# Altium PCB IMX6WBED.PcbDoc (part 7 of 10)
Units mil, origin at the board's own origin, x right, y up, seen from the top; angles counter-clockwise.
Board outline 3318.23 x 4815.16 mil, 6 copper layers (Top Layer, L2_GND_1, L3_INT_1, L6_INT_2, L7_PWR_2, Bottom Layer), stack 27.7 mil thick; 504 components, 400 nets, 2357 pads, 1199 vias.
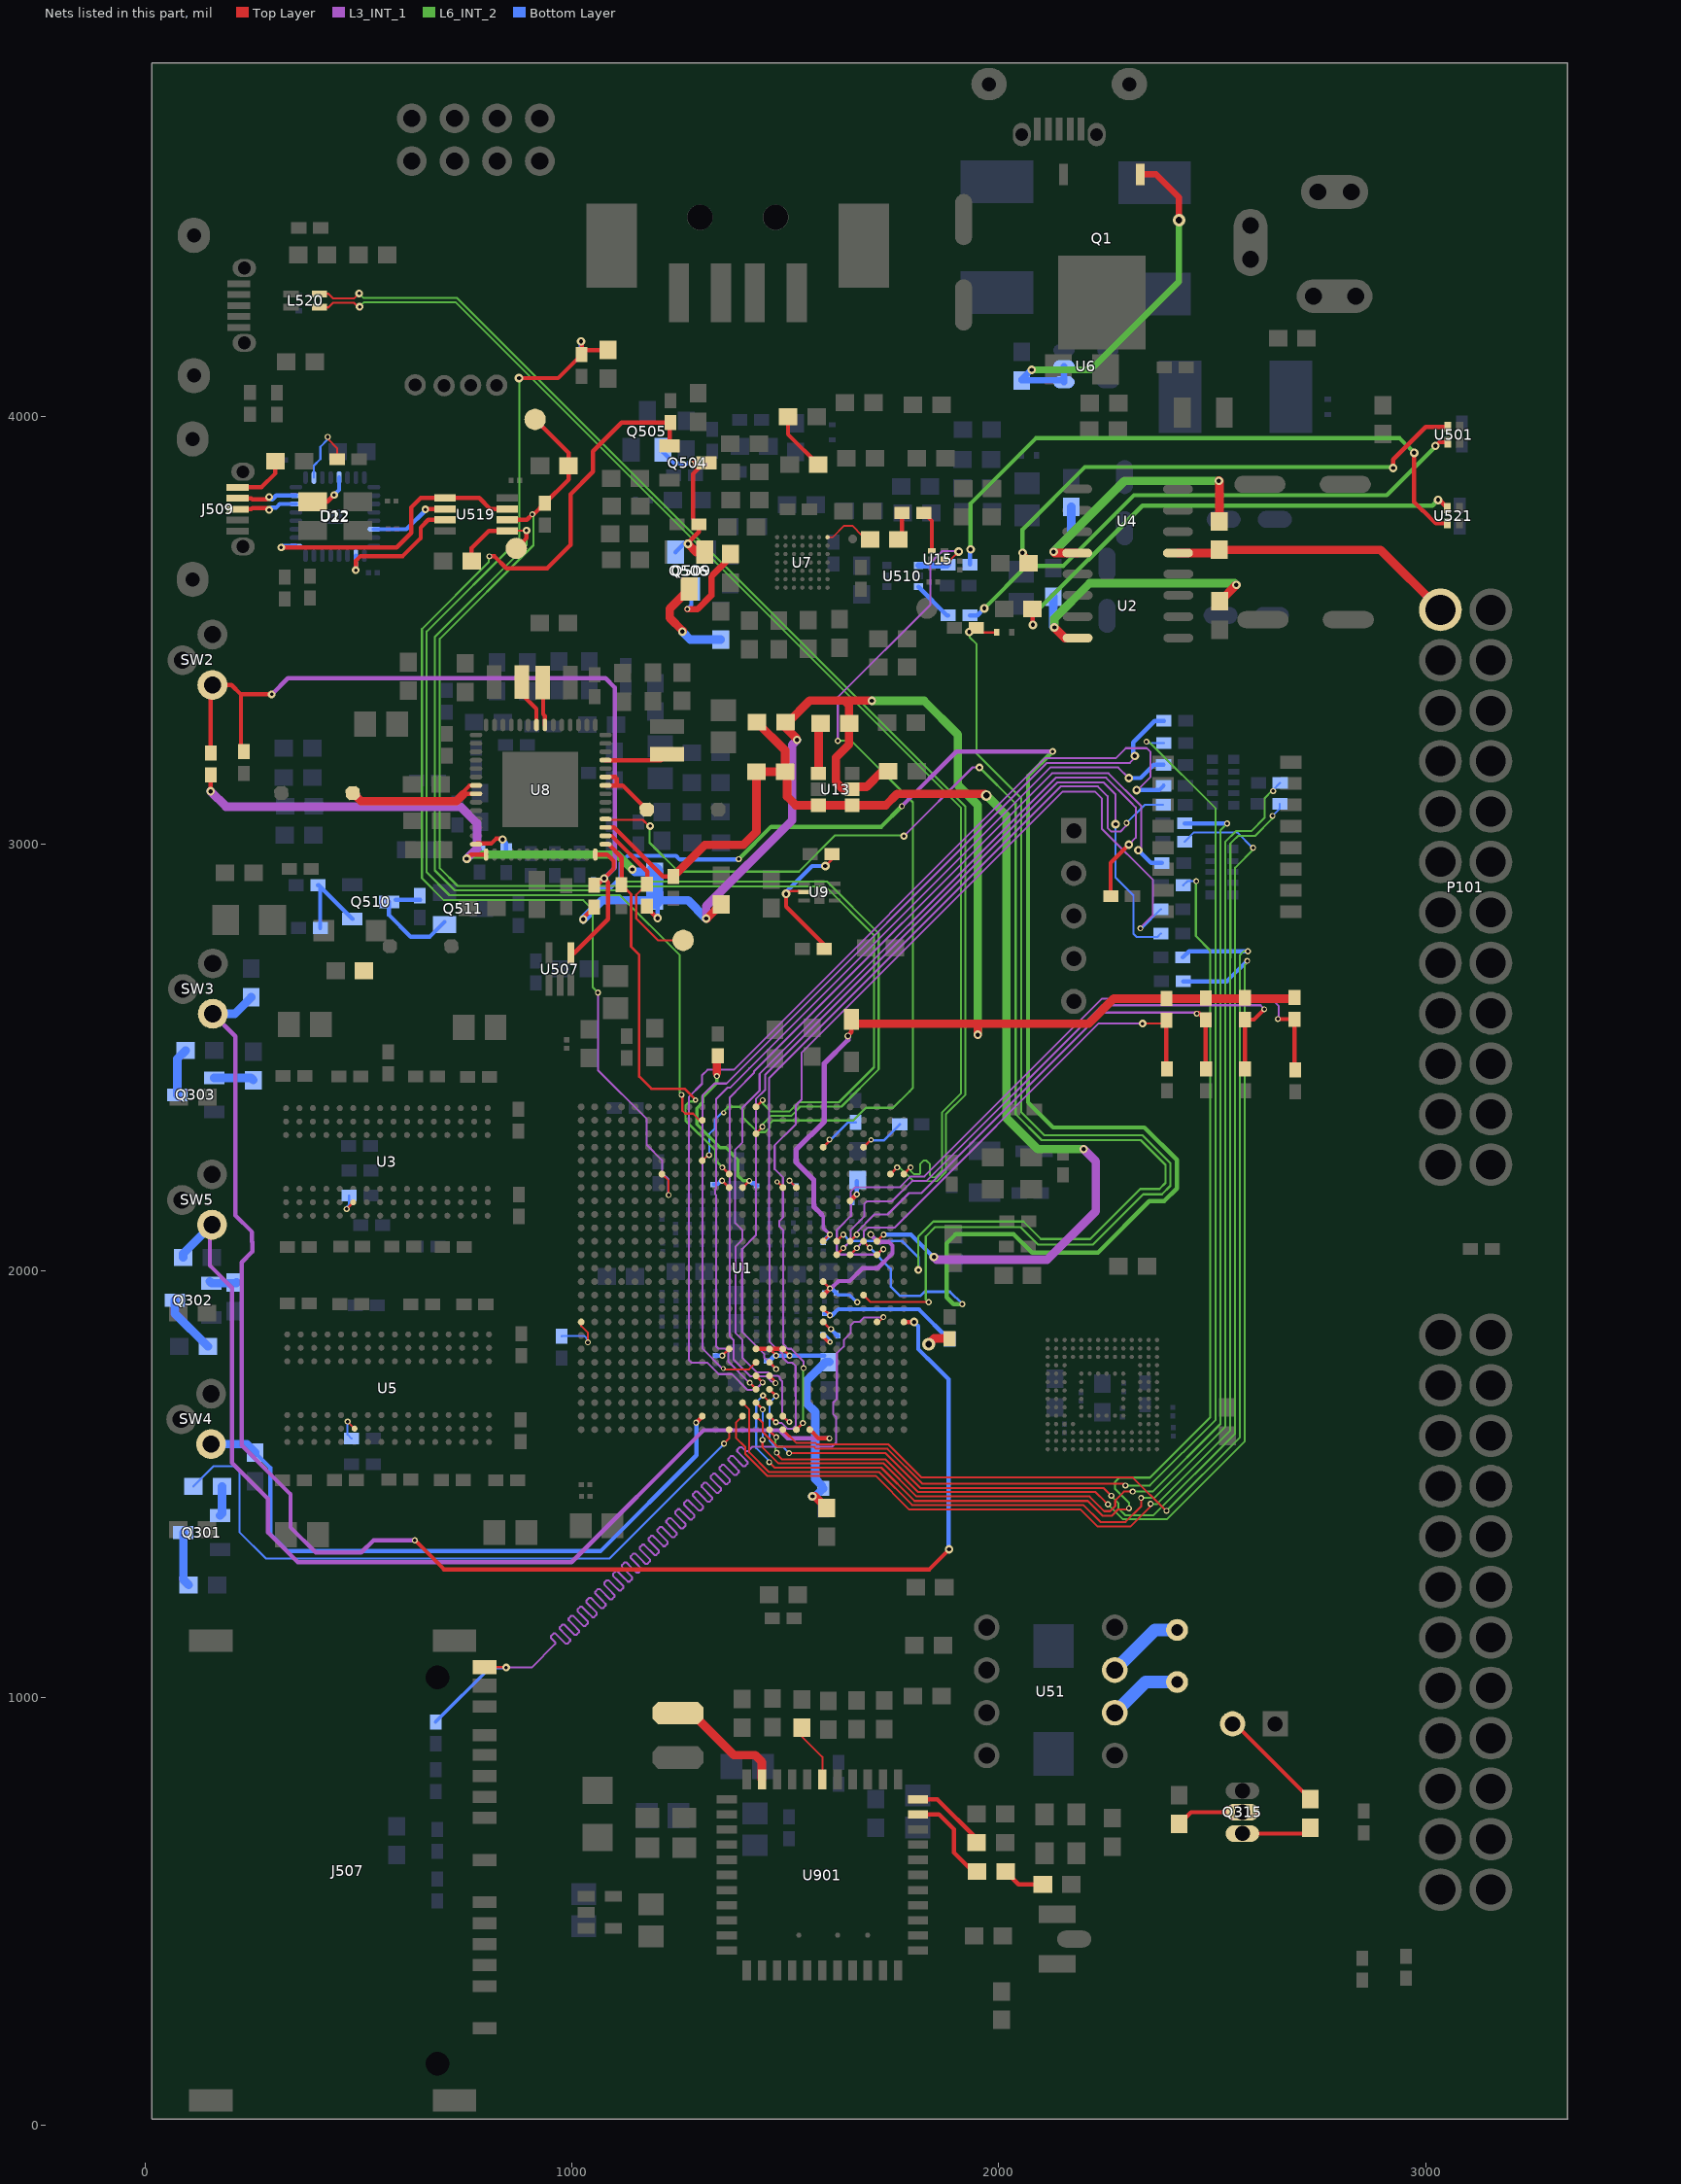
[diagram p11: the nets of this part, all layers, seen from the top]

## Via types
v1: diameter 14, hole 8, Top Layer to Bottom Layer, 296 vias
v2: diameter 14, hole 8, Top Layer to Bottom Layer, tented both sides, 244 vias
v3: diameter 20, hole 10, Top Layer to Bottom Layer, 221 vias
v4: diameter 20, hole 10, Top Layer to Bottom Layer, tented both sides, 112 vias
v5: diameter 18, hole 8, Top Layer to Bottom Layer, tented both sides, 74 vias
v6: diameter 12, hole 6, Top Layer to Bottom Layer, tented both sides, 60 vias
v7: diameter 16, hole 8, Top Layer to Bottom Layer, 59 vias
v8: diameter 30, hole 15, Top Layer to Bottom Layer, 33 vias
v9: diameter 40, hole 20, Top Layer to Bottom Layer, 16 vias
v10: diameter 30, hole 15, Top Layer to Bottom Layer, tented both sides, 16 vias
v11: diameter 18, hole 8, Top Layer to Bottom Layer, 16 vias
v12: diameter 12, hole 6, Top Layer to Bottom Layer, 13 vias
v13: diameter 16, hole 8, Top Layer to Bottom Layer, tented both sides, 8 vias
v14: diameter 80, hole 40, Top Layer to Bottom Layer, 5 vias
v15: diameter 14, hole 6, Top Layer to Bottom Layer, tented both sides, 4 vias
v16: diameter 50, hole 30, Top Layer to Bottom Layer, 3 vias
v17: diameter 16, hole 10, Top Layer to Bottom Layer, 3 vias
v18: diameter 25, hole 15, Top Layer to Bottom Layer, tented both sides, 3 vias
v19: diameter 35, hole 20, Top Layer to Bottom Layer, tented both sides, 3 vias
v20: diameter 10, hole 6, Top Layer to Bottom Layer, 3 vias
v21: diameter 18, hole 10, Top Layer to Bottom Layer, tented both sides, 2 vias
v22: diameter 80, hole 45, Top Layer to Bottom Layer, 1 vias
v23: diameter 40, hole 20, Top Layer to Bottom Layer, tented both sides, 1 vias
v24: diameter 11, hole 6, Top Layer to Bottom Layer, tented both sides, 1 vias
v25: diameter 13, hole 6, Top Layer to Bottom Layer, tented both sides, 1 vias
v26: diameter 14, hole 6, Top Layer to Bottom Layer, 1 vias

## Nets (pads, with @x,y where several pads share a name; then routed paths per layer and width w, separated by ;. In a path a pad name is that pad's centre, name@x,y a point inside that pad or via, vN(x,y) a via of type N, cw(c..) or ccw(c..) an arc to the next point about the centre after c; other vN are vias at no path point) (continued)
NetJ507_15: J507.15 R675.1 U1.C17 | length 3228.5
  Top Layer w4.7: J507.15@795.34,1071.67 v5@846.24,1071.67 ; U1.C17@1714.48,1879.96 1718.53,1879.96 1729.47,1890.9 v2(1729.47,1891.61)
  L3_INT_1 w4.7: v5(845.47,1070.9) 905.47,1070.9 960.59,1126.02 960.59,1130.18 950.6,1140.16 950.6,1144.32 956.84,1150.55 961,1150.55 985.12,1126.43 989.28,1126.43 995.52,1132.67 995.52,1136.82 983.46,1148.89 971.39,1160.95 971.39,1165.11 977.63,1171.34 981.79,1171.34 993.85,1159.28 1005.91,1147.22 1010.07,1147.22 1016.31,1153.45 1016.31,1157.61 1004.25,1169.68 992.18,1181.74 992.18,1185.9 998.42,1192.13 1002.58,1192.13 1014.64,1180.07 1026.7,1168.01 1030.86,1168.01 1037.1,1174.24 1037.1,1178.4 1025.03,1190.46 1012.97,1202.53 1012.97,1206.69 1019.21,1212.92 1023.37,1212.92 1035.43,1200.86 1047.49,1188.8 1051.65,1188.8 1057.89,1195.03 1057.89,1199.19 1033.76,1223.32 1033.76,1227.47 1040,1233.71 1044.15,1233.71 1056.22,1221.65 1068.28,1209.58 1072.44,1209.58 1078.68,1215.82 1078.68,1219.98 1066.61,1232.04 1054.55,1244.11 1054.55,1248.26 1060.79,1254.5 1064.94,1254.5 1089.07,1230.37 1093.23,1230.37 1099.46,1236.61 1099.46,1240.77 1087.4,1252.83 1075.34,1264.89 1075.34,1269.05 1081.57,1275.29 1085.73,1275.29 1097.8,1263.23 1109.86,1251.16 1114.02,1251.16 1120.25,1257.4 1120.25,1261.56 1108.19,1273.62 1096.13,1285.68 1096.13,1289.84 1102.36,1296.08 1106.52,1296.08 1118.58,1284.01 1130.65,1271.95 1134.81,1271.95 1141.04,1278.19 1141.04,1282.35 1128.98,1294.41 1116.92,1306.47 1116.92,1310.63 1123.15,1316.87 1127.31,1316.87 1139.37,1304.8 1151.44,1292.74 1155.59,1292.74 1161.83,1298.98 1161.83,1303.13 1149.77,1315.2 1137.7,1327.26 1137.7,1331.42 1143.94,1337.66 1148.1,1337.66 1160.16,1325.59 1172.23,1313.53 1176.38,1313.53 1182.62,1319.77 1182.62,1323.92 1170.56,1335.99 1158.49,1348.05 1158.49,1352.21 1164.73,1358.44 1168.89,1358.44 1193.01,1334.32 1197.17,1334.32 1203.41,1340.55 1203.41,1344.71 1191.35,1356.78 1179.28,1368.84 1179.28,1373 1185.52,1379.23 1189.68,1379.23 1201.74,1367.17 1213.8,1355.11 1217.96,1355.11 1224.2,1361.34 1224.2,1365.5 1200.07,1389.63 1200.07,1393.79 1206.31,1400.02 1210.47,1400.02 1222.53,1387.96 1234.59,1375.9 1238.75,1375.9 1244.99,1382.13 1244.99,1386.29 1232.92,1398.35 1220.86,1410.42 1220.86,1414.57 1227.1,1420.81 1231.25,1420.81 1243.32,1408.75 1255.38,1396.68 1259.54,1396.68 1265.78,1402.92 1265.78,1407.08 1253.71,1419.14 1241.65,1431.21 1241.65,1435.36 1247.89,1441.6 1252.04,1441.6 1264.11,1429.54 1276.17,1417.47 1280.33,1417.47 1286.56,1423.71 1286.56,1427.87 1274.5,1439.93 1262.44,1451.99 1262.44,1456.15 1268.67,1462.39 1272.83,1462.39 1296.96,1438.26 1301.12,1438.26 1307.35,1444.5 1307.35,1448.66 1295.29,1460.72 1283.23,1472.78 1283.23,1476.94 1289.46,1483.18 1293.62,1483.18 1305.68,1471.11 1317.75,1459.05 1321.91,1459.05 1328.14,1465.29 1328.14,1469.45 1304.02,1493.57 1304.02,1497.73 1310.25,1503.97 1314.41,1503.97 1326.47,1491.9 1338.54,1479.84 1342.69,1479.84 1348.93,1486.08 1348.93,1490.23 1336.87,1502.3 1324.8,1514.36 1324.8,1518.52 1331.04,1524.76 1335.2,1524.76 1347.26,1512.69 1359.33,1500.63 1363.48,1500.63 1369.72,1506.87 1369.72,1511.02 1357.66,1523.09 1345.59,1535.15 1345.59,1539.31 1351.83,1545.54 1355.99,1545.54 1368.05,1533.48 1380.11,1521.42 1384.27,1521.42 1390.51,1527.66 1390.51,1531.81 1378.45,1543.88 1366.38,1555.94 1366.38,1560.1 1372.62,1566.33 1376.78,1566.33 1400.9,1542.21 1405.06,1542.21 1411.3,1548.44 1411.3,1552.6 1399.23,1564.66 1387.17,1576.73 1387.17,1580.89 1393.41,1587.12 1397.57,1587.12 1407.55,1577.14 1411.71,1577.14 1422.47,1587.9 1609.47,1587.9 1618.47,1596.9 1618.47,1657.9 1611.7,1664.67 1611.7,1687.22 1611.83,1687.35 1611.83,1691.26 1620.47,1699.9 1620.47,1806.9 1636.47,1822.9 1636.47,1837.9 1652.47,1853.9 1652.47,1871.9 1660.47,1879.9 1673.47,1879.9 1684.47,1890.9 1729.47,1890.9 v2(1729.47,1891.61)
  Bottom Layer w8: R675.1@680.47,943.49 807.88,1070.9 v5(845.47,1070.9)
NetJ509_1: J509.1 L24.2 | length 130.5
  Top Layer w10: J509.1@216.47,3834.9 272.47,3834.9 305.01,3867.44 L24.2@305.01,3895.9
NetJ509_2: J509.2 U22.15 | length 146.1
  Top Layer w10: J509.2@216.47,3809.31 248.47,3809.31 251.26,3806.51 285.08,3806.51 v5(290.47,3811.9)
  Bottom Layer w10: v5(290.47,3811.9) 295.47,3806.9 298.19,3806.9 307.09,3815.8 353.17,3815.8 U22.15@353.17,3815.5
NetJ509_3: J509.3 U22.14 | length 144.5
  Top Layer w10: J509.3@216.47,3783.72 248.47,3783.72 251.26,3786.51 284.86,3786.51 v5@289.47,3781.9
  Bottom Layer w10: v5(290.47,3781.9) 295.47,3786.9 306.47,3786.9 315.37,3795.8 U22.14@353.17,3795.8
NetL2_2: L2.2 U8.22 | length 115
  Top Layer w10: L2.2@882.43,3378.9 882.43,3349.94 916.47,3315.9 916.47,3278.49 U8.22@916.79,3278.17
NetL3_2: L3.2 U8.21 | length 101.8
  Top Layer w10: L3.2@931.51,3377.9 932.47,3376.94 932.47,3303.2 936.47,3299.2 U8.21@936.47,3278.17
NetL8_2: L8.2 U8.11 | length 149.9
  Top Layer w10: U8.11@1078.47,3195.75 1208.28,3195.75 L8.2@1222.47,3209.94
NetL9_1: L9.1 U8.35 U8.36 | length 344.8
  Top Layer w10: U8.36@775.19,3117.01 746.36,3117.01 745.47,3117.9 745.47,3121.9 760.26,3136.7 U8.35@775.19,3136.7
  Top Layer w20: L9.1@486.47,3118.9 505.47,3099.9 729.25,3099.9 746.36,3117.01
NetL11_2: L11.2 U8.8 U8.9 | length 163.9
  Top Layer w10: U8.8@1078.47,3136.7 1104.47,3136.7 ; U8.9@1078.47,3156.38 1100.99,3156.38 1104.47,3152.9 1104.47,3136.7 ; L11.2@1175.15,3079.9 1118.37,3136.7 1104.47,3136.7
NetL507_1: L507.1 R564.2 | length 141.4
  Top Layer w10: L507.1@1506.01,3999.9 1506.01,3958.83 R564.2@1576.93,3887.9
NetL508_1: L508.1 Q506.3 | length 227.3
  Top Layer w20: v3@1258.91,3498.13 1258.91,3498.7 1228.9,3528.71 1228.9,3550.73 Q506.3@1274.47,3596.3
  Bottom Layer w20: v3(1258.25,3496.79) 1276.6,3478.44 L508.1@1348.47,3478.44
NetL510_1: L510.1 Q509.3 | length 235.5
  Top Layer w10: v1(1270.16,3549.61) v1@1270.28,3549.49
  Top Layer w15: v1@1270.28,3549.49 1294.05,3549.49 1326.41,3581.86 1326.41,3626.36 1371.47,3671.41 L510.1@1371.47,3678.36
  Bottom Layer w10: v1@1270.37,3549.48 1279.47,3558.58 Q509.3@1279.47,3596.3
NetL520_1: L520.1 U1.B6 | length 3048.2
  Top Layer w4.5: 488.47,4277.09 488.47,4277.15 ; 488.65,4276.9 489.47,4276.9 v5@497.47,4284.9
  Top Layer w5: L520.1@408.47,4287.9 429.47,4287.9 440.22,4277.15 488.47,4277.15
  Top Layer w6: U1.B6@1745.97,2226.42 v2(1761.72,2242.17)
  L6_INT_2 w4.5: v5(501.47,4288.9) 512.22,4278.15 730.95,4278.15 1921.22,3087.88 1921.22,2411.63 1875.97,2366.38 1875.97,2230.97 1854.82,2209.82 1799.96,2209.82 1767.61,2242.17 v2(1761.72,2242.17)
NetL520_4: L520.4 U1.A6 | length 3049.9
  Top Layer w4.5: 488.47,4267.15 v5@504.09,4251.52
  Top Layer w5: L520.4@408.47,4256.4 429.47,4256.4 440.22,4267.15 488.47,4267.15
  Top Layer w6: U1.A6@1777.47,2226.42 v2(1793.22,2242.17)
  L6_INT_2 w4.5: v5(502.47,4257.9) 513.22,4268.65 727.11,4268.65 1911.72,3084.04 1911.72,2415.56 1866.47,2370.31 1866.47,2234.9 1850.47,2218.9 1843.47,2218.9 1838.47,2223.9 1838.47,2249.9 1830.47,2257.9 1823.47,2257.9 1815.47,2249.9 1815.47,2227.9 1813.47,2225.9 1801.47,2225.9 1793.22,2234.15 v2(1793.22,2242.17)
NetL900_2: L900.2 U901.21 | length 284.4
  Top Layer w20: L900.2@1248.47,963.9 1280.97,963.9 1379.42,865.45 1428.99,865.45 1444.85,849.59 U901.21@1444.85,808.95
NetLS1_2: LS1.2 R712.1 | length 255.1
  Top Layer w10: LS1.2@2547.47,938.9 2552.93,938.9 R712.1@2729.47,762.36
NetP101_1: P101.1 R6.2 U4.5 | length 676.3
  Top Layer w20: U4.5@2419.47,3680.9 2508.93,3680.9 R6.2@2516.47,3688.44 2893.93,3688.44 P101.1@3034.47,3547.9
NetQ1_G: Q1.G R9.2 U6.4 U6.5 | length 909.9
  Top Layer w15: Q1.G@2331.47,4567.9 2367.55,4567.9 2422.03,4513.42 v8(2422.03,4460.57)
  L6_INT_2 w15: v3(2076.75,4110.08) 2215.3,4110.08 2421.38,4316.16 v8@2421.38,4459.2
  Bottom Layer w15: v3@2074.96,4109.27 2053.47,4087.78 R9.2@2053.47,4085.44 2148.13,4085.44 U6.4@2152.47,4081.1 U6.5@2152.47,4118.5
NetQ301_1: Q301.1 R306.1 | length 69.8
  Bottom Layer w20: Q301.1@175.47,1426.9 179.93,1431.36 R306.1@179.93,1494.9
NetQ301_3: Q301.3 R305.1 | length 128.2
  Bottom Layer w20: Q301.3@89.47,1386.9 89.47,1276.44 R305.1@102.01,1263.9
NetQ302_1: Q302.1 R307.1 | length 66
  Bottom Layer w20: Q302.1@150.93,1975.44 Q302.1@155.47,1970.9 213.01,1970.9 R307.1@214.47,1972.36
NetQ302_3: Q302.3 R308.1 | length 140.1
  Bottom Layer w20: Q302.3@69.47,1930.9 69.47,1900.36 R308.1@146.93,1822.9
NetQ303_1: Q303.1 R310.1 | length 94.3
  Bottom Layer w20: Q303.1@161.47,2451.9 248.01,2451.9 R310.1@253.47,2446.44
NetQ303_3: Q303.3 R309.1 | length 112.1
  Bottom Layer w20: Q303.3@75.47,2411.9 75.47,2496.36 R309.1@95.01,2515.9
NetQ315_2: Q315.2 R799.1 | length 159.4
  Top Layer w10: R799.1@2422.47,704.44 2449.93,731.9 Q315.2@2570.47,731.9
NetQ315_3: Q315.3 R712.2 | length 164.6
  Top Layer w10: Q315.3@2570.47,681.9 2715.93,681.9 R712.2@2729.47,695.44
NetQ504_1: Q504.1 R725.2 U1.W6 | length 2800.2
  Top Layer w5: U1.W6@1210.54,2226.42 1226.31,2210.65 v1@1226.31,2177.53
  Top Layer w10: v1(806.12,3673.09) 818.58,3673.09 846.65,3645.02 941.68,3645.02 996.69,3700.03 996.69,3818.69 1049.3,3871.3 1049.3,3919.13 1116.48,3986.31 R725.2@1230.47,3986.31 1228.47,3984.31 Q504.1@1228.47,3931.9 1228.47,3957.55
  L3_INT_1 w5: v1@1060.73,2651.24 1060.73,2469.79 1175.17,2355.35 1175.17,2294.64 1211,2258.81 1211,2229.14 1225.26,2214.88 v1@1225.26,2178.46
  L6_INT_2 w5: v1@804.65,3672.6 804.65,3659.34 648.25,3502.94 648.25,2919.28 699.62,2867.91 1026.27,2867.91 1048.8,2845.38 1048.8,2663.32 v1(1060.65,2651.47)
  other v1: 1226.36,2177.36
NetQ504_3: Q504.3 Q505.1 Q506.1 Q509.1 R557.2 | length 423.3
  Top Layer w10: v3@1270.92,3704.1 1297.06,3730.24 R557.2@1297.06,3747.9 1283.14,3761.82 1283.14,3865.98 Q504.3@1309.06,3891.9 ; v1(1278.43,3890.29) 1280.04,3891.9 Q504.3@1309.06,3891.9 ; Q504.3@1314.47,3891.9 Q504.3@1309.06,3891.9
  Top Layer w20: v3(1271.57,3702.55) 1291.22,3682.9 Q506.1@1311.27,3682.9
  Bottom Layer w10: Q505.1@1213.27,3922.9 1213.27,3917.14 1239.9,3890.51 v1@1278.85,3890.51 ; Q509.1@1242.67,3682.9 1263.87,3704.1 1270.92,3704.1 1269.89,3703.07 1269.47,3703.07 1269.99,3702.55 v3(1271.57,3702.55)
NetQ510_1: Q510.1 R592.1 R632.1 | length 208.1
  Bottom Layer w10: R632.1@405.06,2902.9 406.47,2902.9 Q510.1@485.47,2823.9 ; R592.1@410.06,2802.9 R632.1@410.06,2897.9
NetQ510_3: Q510.3 Q511.1 R589.1 | length 254.1
  Bottom Layer w10: Q510.3@571.47,2863.9 571.47,2832.9 622.47,2781.9 666.27,2781.9 Q511.1@701.47,2817.1 ; Q510.3@587.06,2868.49 R589.1@644.47,2868.49
NetR2_1: R2.1 R3.1 U2.4 | length 675
  Top Layer w20: v3@2130.07,3506.37 2154.54,3481.9 U2.4@2184.47,3481.9 ; R3.1@2517.47,3568.36 2518.49,3568.36 v3(2556.31,3606.18)
  L6_INT_2 w20: v3(2130.07,3506.65) 2130.07,3527.53 2212.87,3610.33 2552.16,3610.33 v3(2556.31,3606.18)
  Bottom Layer w20: R2.1@2127.47,3578.44 2127.47,3509.25 v3(2130.07,3506.65)
NetR5_1: R5.1 R6.1 U4.4 | length 726.8
  Top Layer w20: v3(2128.45,3683.59) 2131.14,3680.9 U4.4@2183.47,3680.9 ; v3@2515.78,3850.18 2516.47,3849.49 R6.1@2516.47,3755.36
  L6_INT_2 w20: v3(2128.45,3683.59) 2294.54,3849.68 v3(2515.28,3849.68)
  Bottom Layer w20: v3@2129.62,3686.05 2169.47,3725.9 R5.1@2169.47,3789.44
NetR10_1: R10.1 R158.2 | length 65.3
  Top Layer w10: R10.1@1764.93,3712.9 1772.88,3720.84 R158.2@1772.88,3774.9
NetR10_2: R10.2 U7.G7 | length 114.8
  Top Layer w4: U7.G7@1598.55,3717.98 1610.64,3717.98 1637.53,3744.87 1656.5,3744.87 1680.01,3721.36 R10.2@1680.01,3708.9
NetR29_1: R29.1 TP13.9 U8.2 | length 383.1
  Top Layer w5: R29.1@1175.47,2905.49 1150.47,2880.49 1150.47,2824.9 1201.47,2773.9 TP13.9@1260.47,2773.9
  Top Layer w10: U8.2@1078.47,3018.59 1092.69,3018.59 1176.47,2934.81 R29.1@1176.47,2906.49
NetR30_2: R30.2 U1.D11 | length 3675.8
  Top Layer w5: U1.D11@1682.98,2068.94 1682.98,2068.39 v2(1697.47,2053.9)
  L3_INT_1 w10: v2(1772.47,3087.9) 1900.47,3215.9 2125.47,3215.9 2125.81,3215.56 v13(2125.81,3216.18)
  L6_INT_2 w10: v2(1390.47,2963.9) 1466.47,3039.9 1724.47,3039.9 v2@1771.97,3087.4 ; v2(1914.27,1921.93) 1893.46,1921.93 1877.54,1937.85 1877.54,2064.44 1898.53,2085.43 2034.94,2085.43 2077.85,2042.52 2232.15,2042.52 2352.51,2162.88 2387.21,2162.88 2416.98,2192.65 2416.98,2259.69 2341.08,2335.59 2126.78,2335.59 2068.38,2393.99 2068.38,3158.75 v13(2125.81,3216.18) v13@2125.81,3215.56
  Bottom Layer w6: v2(1697.47,2053.9) 1746.46,2004.91 1746.46,1962.91 1768.47,1940.9 1816.05,1940.9 1826.1,1950.95 1885.25,1950.95 v2(1914.27,1921.93)
  Bottom Layer w10: R30.2@1050.47,2895.9 1089.47,2895.9 1113.47,2919.9 1113.47,2954.9 1130.47,2971.9 1243.47,2971.9 1252.47,2962.9 v2@1389.47,2962.9
NetR34_1: R34.1 R35.2 U9.5 | length 349.7
  Top Layer w6: v4@1501.47,2885.9 1504.47,2888.9 U9.5@1532.47,2888.9 ; v4(1593.47,2947.9) 1609.06,2963.49 R35.2@1609.06,2975.9
  Top Layer w10: v4@1501.47,2885.9 1501.47,2852.9 1590.06,2764.31 R34.1@1590.06,2760.9
  Bottom Layer w10: v4(1501.47,2882.9) 1501.47,2886.9 1562.47,2947.9 v4(1593.47,2947.9)
NetR38_1: R38.1 U1.G4 | length 106
  Top Layer w6: U1.G4@1588.49,2289.41 1604.24,2305.16 v2@1602.5,2306.9 ; v2@1602.47,2306.9 v2(1602.83,2307.26)
  Bottom Layer w6: v2@1602.47,2306.9 v2(1602.83,2307.26) ; v2@1602.5,2306.9 1604.24,2305.16 1646.39,2347.31 R38.1@1664.47,2347.31
NetR89_2: R89.2 U3.L8 | length 53.7
  Top Layer w6: v1(472.1,2144.39) 472.1,2145.02 U3.L8@487.51,2160.43
  Bottom Layer w6: v1@470.84,2147.53 477.88,2154.57 R89.2@477.88,2175.9
NetR94_1: R94.1 R95.2 U1.E12 | length 1098.2
  Top Layer w4.7: v5(2336.78,2578.77) 2384.93,2578.77 R94.1@2392.47,2586.31
  Top Layer w6: U1.E12@1651.49,2037.44 v2(1667.23,2053.19)
  Top Layer w10: R94.1@2392.47,2586.31 2392.47,2473.49 R95.2@2393.47,2472.49
  L3_INT_1 w4.7: v2(1667.23,2053.19) 1683.47,2069.43 1683.47,2091.9 1692.47,2100.9 1755.39,2100.9 2233.98,2579.49 v5@2338.92,2579.49
NetR97_1: R97.1 R98.2 U1.E11 | length 1182.8
  Top Layer w6: U1.E11@1651.49,2068.94 v2(1667.23,2084.69)
  Top Layer w10: v1@2462.08,2603.74 2468.04,2603.74 R97.1@2484.47,2587.31 2484.47,2473.49 R98.2@2485.47,2472.49
  L3_INT_1 w4.7: v2(1667.23,2084.69) 1667.23,2090.66 1708.47,2131.9 1739.47,2131.9 1789.47,2181.9 1818.53,2181.9 2241.4,2604.77 v1@2464.37,2604.77
  other v1: 2463.49,2602.26
NetR105_2: R105.2 R106.1 U1.F12 | length 1451
  Top Layer w6: U1.F12@1619.99,2037.44 v2(1635.74,2053.19)
  Top Layer w10: R105.2@2576.47,2472.49 R106.1@2576.47,2588.31 2597.48,2588.31 v1(2621.58,2612.41)
  L3_INT_1 w4.7: v2(1635.74,2053.19) 1652.47,2069.92 1652.47,2094.9 1684.47,2126.9 1684.47,2155.9 1691.47,2162.9 1749.6,2162.9 1796.6,2209.9 1830.17,2209.9 2236.85,2616.58 2242.15,2621.88 2612.88,2621.88 2622.18,2612.58 v1@2622.18,2612.28
NetR107_2: R107.2 U1.AE17 | length 126.1
  Top Layer w4.5: U1.AE17@1021.57,1879.96 1021.57,1870.3 1037.31,1854.56 v1@1037.31,1832.71
  Bottom Layer w4.5: R107.2@975.47,1846.49 976.73,1847.75 1028.25,1847.75 1037.11,1838.89 v1(1037.11,1832.39)
NetR108_2: R108.2 R109.1 U1.C12 | length 1677.8
  Top Layer w6: U1.C12@1714.48,2037.44 1728.22,2051.19 v2@1728.22,2049.94
  Top Layer w10: v1@2653.44,2589.31 R109.1@2692.47,2589.31 2692.47,2472.49 R108.2@2694.47,2470.49
  L3_INT_1 w4.7: v2@1728.22,2049.94 1728.22,2051.19 1714.93,2037.9 1629.22,2037.9 1620.47,2046.65 1620.47,2095.9 1625.47,2100.9 1653.43,2128.85 1653.43,2174.05 1653.32,2174.16 1653.32,2185.75 1663.47,2195.9 1768.47,2195.9 1793.47,2220.9 1825.58,2220.9 2242.09,2637.41 2638.23,2637.41 2655.28,2620.36 2655.28,2591.56 v1(2653.44,2589.72)
  other v2: 1729.15,2050.36
NetR158_1: R158.1 U15.4 | length 96.5
  Top Layer w10: R158.1@1824.06,3774.9 1842.95,3756.01 U15.4@1842.95,3686.26
NetR447_1: R447.1 U13.1 | length 112.5
  Top Layer w20: U13.1@1577.47,3164.9 R447.1@1577.47,3277.36
NetR554_2: R554.2 TVS502.2 U1.D15 | length 2671
  Top Layer w5: U1.D15@1682.98,1942.96 1698.9,1927.04 1835.73,1927.04 v1@1835.89,1926.88 ; v3(1930.7,3496.09) 1940.51,3505.9 R554.2@1947.06,3505.9 1958.06,3494.9 TVS502.2@1995.04,3494.9
  L6_INT_2 w5: v1(1835.41,1926.4) 1828.65,1933.16 1828.65,2080.17 1850.65,2102.17 2050.48,2102.17 2091.52,2061.13 2219.98,2061.13 2338.04,2179.19 2382.06,2179.19 2401.68,2198.81 2401.68,2251.75 2336.26,2317.17 2106.68,2317.17 2052.32,2371.53 2052.32,3106.5 1947.91,3210.91 1947.91,3467.36 1931.6,3483.67 v3@1931.6,3495.37
NetR568_1: R568.1 SHA7.1 TVS505.2 U1.T2 | length 2646.9
  Top Layer w5: v2(1256.47,2411.9) 1256.47,2412.9 1258.47,2410.9 1258.47,2374.79 1265.36,2367.9 1283.47,2367.9 1298.97,2352.4 U1.T2@1305.03,2352.4
  Top Layer w10: v3(875.72,4090.52) 967.5,4090.52 R568.1@1022.47,4145.49 ; v3(1021.19,4176.42) 1022.47,4175.14 R568.1@1022.47,4145.49 ; SHA7.1@1084.47,4156.36 1033.34,4156.36 R568.1@1022.47,4145.49
  L6_INT_2 w5: v3@876.88,4089.1 876.47,4088.69 876.47,3713.9 659.47,3496.9 659.47,2932.9 712.73,2879.64 1111.73,2879.64 1252.56,2738.81 1252.56,2711.99 1252.47,2711.9 1252.47,2473.23 1252.32,2473.08 1252.32,2417.05 v2@1254.47,2414.9
  Bottom Layer w10: TVS505.2@1020.47,4135.33 1020.47,4174.13 v3@1020.6,4174.26
NetR569_1: R569.1 U521.1 | length 1470.2
  Top Layer w10: v3(2972.91,3915.64) 2972.91,3799.7 2992.29,3780.32 2993.46,3780.32 3023.35,3750.43 U521.1@3050.59,3750.43
  L6_INT_2 w10: v3(1933.76,3689.67) 1933.76,3796.95 2086.46,3949.65 2897.43,3949.65 2938.9,3949.65 v3(2972.91,3915.64)
  Bottom Layer w10: R569.1@1932.06,3653.9 1932.06,3682.9 v3@1934.44,3685.28
NetR569_2: R569.2 U510.4 | length 70.2
  Bottom Layer w15: U510.4@1811.47,3651.9 1878.88,3651.9 R569.2@1880.88,3653.9
NetR573_1: R573.1 U501.1 | length 1287.2
  Top Layer w10: v3(3022.7,3931.89) 3031.24,3940.43 U501.1@3051.59,3940.43
  L6_INT_2 w10: v3(1965.86,3551.27) 2065.68,3651.09 2151.18,3651.09 2316.32,3816.23 2908.8,3816.23 3022.7,3930.13 v3(3022.7,3931.89)
  Bottom Layer w10: R573.1@1932.06,3534.9 1949.25,3534.9 v3@1964.88,3550.53
NetR573_2: R573.2 U510.6 | length 97.2
  Bottom Layer w10: U510.6@1811.47,3601.9 1878.47,3534.9 R573.2@1880.88,3534.9
NetR599_2: R599.2 U5.L8 | length 65.5
  Top Layer w4.5: v1@475.18,1645.76 U5.L8@490.51,1630.43
  Bottom Layer w4.5: v1(474.26,1646.75) 474.26,1616.52 R599.2@483.88,1606.9
NetR605_2: R605.2 U1.D4 | length 111.6
  Top Layer w6: U1.D4@1682.98,2289.41 1699.83,2306.26 v6(1700.53,2306.26)
  Bottom Layer w6: v6(1700.53,2306.26) 1699.83,2306.26 1698.73,2305.16 1707.36,2305.16 1730.12,2305.14 R605.2@1767.88,2342.9
NetR686_1: R686.1 U1.M20 | length 2218
  Top Layer w4.7: v6(1354.47,1770.9) 1356.47,1768.9 1414.44,1768.9 U1.M20@1431.01,1785.48
  Top Layer w6: U1.M20@1429.89,1785.48 U1.M20@1431.01,1785.48
  L3_INT_1 w4.7: v6(1354.47,1770.9) 1352.47,1770.9 1305.47,1817.9 1305.47,2409.9 1334.12,2438.55 1361.82,2438.55 2112.71,3189.44 2307.01,3189.44 2318.47,3200.9 v4(2318.47,3205.9)
  Bottom Layer w10: v4(2318.47,3205.9) 2314.45,3209.92 2314.45,3237.38 2364.97,3287.9 R686.1@2386.88,3287.9
NetR687_1: R687.1 U1.M24 | length 2922
  Top Layer w4.7: U1.M24@1431.01,1659.49 1446.76,1643.74 1446.76,1622.88 1481.74,1587.9 1521.09,1587.9 1521.29,1587.7 1566.67,1587.7 1571.33,1583.04 1738.9,1583.04 1820.74,1501.2 2108.51,1501.2 2292.19,1501.18 v2(2296.47,1496.9)
  L6_INT_2 w4.7: v2(2296.47,1496.9) 2353.47,1496.9 2507.82,1651.25 2507.82,2794.25 2508.05,2794.48 2508.05,2940.6 2508.09,2940.64 2508.09,3082.74 2352.57,3238.26 2345.27,3238.26 v1@2344.9,3238.63
  Bottom Layer w4.7: v1(2345.8,3238.95) 2348.85,3235.9 R687.1@2386.88,3235.9
NetR688_1: R688.1 U1.M23 | length 2853.3
  Top Layer w4.7: v1(1446.28,1603.79) 1446.28,1586.39 1484.03,1548.64 1730.14,1548.64 1807.39,1471.39 2212.6,1471.39 2237.58,1446.41 2237.58,1446.23 2246.86,1436.95 2260.69,1436.95 2272.57,1448.83 2272.57,1462.33 2293.14,1482.9 v2(2313.47,1482.9)
  Top Layer w6: U1.M23@1431.01,1690.99 v2(1446.76,1675.24)
  L6_INT_2 w4.7: v2(2313.47,1482.9) 2360.47,1482.9 2518.94,1641.37 2518.94,2787.37 2518.94,3031.76 v1(2534.85,3047.67)
  Bottom Layer w4.7: v1@1446.76,1601.35 v2(1446.76,1675.24)
  Bottom Layer w10: R688.1@2435.06,3047.9 v1@2534.65,3047.9
NetR689_1: R689.1 U1.N23 | length 2990.3
  Top Layer w4.7: U1.N23@1399.52,1690.99 1415.47,1675.04 1415.47,1574.68 1461.52,1528.63 1719.39,1528.63 1796.46,1451.56 2197.8,1451.56 2237.83,1411.53 2296.6,1411.53 2333.47,1448.4 v2(2333.47,1467.9)
  L6_INT_2 w4.7: v2(2333.47,1467.9) 2363.47,1467.9 2530.53,1634.96 2530.53,2702.82 2530.71,2703 2530.71,3005.01 2555.34,3029.64 2591.21,3029.64 2622.47,3060.9 2622.47,3107.03 v1@2639,3123.56
  Bottom Layer w4.7: v1(2642.45,3123.56) 2642.45,3126.29 R689.1@2659.06,3142.9
NetR690_1: R690.1 U1.L22 | length 2961.3
  Top Layer w4.7: v1(1508.35,1572.83) 1734.79,1572.83 1816.54,1491.08 2245.29,1491.08 v2(2263.47,1472.9) v2@2265.47,1472.9
  Top Layer w6: U1.L22@1462.51,1722.48 v2(1478.26,1706.74)
  L6_INT_2 w4.7: v2(2263.47,1472.9) 2263.47,1472.17 2280.47,1455.17 2280.47,1442.93 2295.93,1427.47 2362.34,1427.47 2553.34,1618.47 2553.34,2755.29 2553.34,2944.03 2599.86,2990.55 v1(2595.56,2990.55)
  Bottom Layer w4.7: v2(1478.26,1706.74) 1462.47,1690.95 1462.47,1601.9 1476.5,1587.87 1494.02,1587.87 v1@1505.86,1576.04 ; R690.1@2435.06,3004.9 2456.78,3026.62 2558.4,3026.62 v1@2594.89,2990.13
NetR691_1: R691.1 U1.L23 | length 2771.7
  Top Layer w4.5: v15(1447.47,1707.9) 1462.51,1692.86 U1.L23@1462.51,1690.99
  Top Layer w5: v1(1461.95,1551.52) 1474.67,1538.8 1724.63,1538.8 1802.32,1461.11 2208.24,1461.11 2227.07,1442.28 2227.22,1442.28 2243.31,1426.19 2264.37,1426.19 2279,1440.82 v2@2305.16,1440.82
  L6_INT_2 w5: v2(2305.02,1443.51) 2305.02,1440.96 2305.16,1440.82 2305.16,1456.23 2271.95,1489.44 2271.95,1505.28 2282.18,1515.51 2354.01,1515.51 2495.3,1656.8 2495.3,2749.7 2461.88,2783.12 2461.88,2783.81 2461.61,2784.08 v1@2461.61,2910.86
  Bottom Layer w4.7: 1431.47,1684.9 1431.47,1691.9 v15(1447.47,1707.9)
  Bottom Layer w5: 1431.47,1684.9 1431.47,1584.9 1464.67,1551.7 v1@1464.67,1550.06 ; R691.1@2432.06,2902.9 2441.5,2912.34 v1(2462.21,2912.34)
NetR692_1: R692.1 U1.K25 | length 2535.2
  Top Layer w4.7: 1509.75,1612.25 1524.92,1597.08 1562.64,1597.08 ; 1562.66,1597.1 1570.28,1597.1 1574.02,1593.36 1741.57,1593.36 1819.08,1515.85 2313.52,1515.85 v2@2392.69,1436.68 ; v2@2392.69,1436.51 v2@2392.69,1436.68 ; v2(2392.69,1437.74) v2@2392.69,1436.68 ; v2@2393.47,1435.74 2393.47,1435.9 v2@2392.69,1436.68
  Top Layer w6: U1.K25@1494.01,1628 1509.75,1612.25
  L6_INT_2 w4.7: v2@2392.69,1436.51 v2(2392.69,1437.74) 2564.82,1609.87 2564.82,2739.61 2573.41,2748.2 v1(2583.38,2748.2)
  Bottom Layer w10: R692.1@2431.06,2733.9 2445.36,2748.2 v1(2583.38,2748.2)
NetR693_1: R693.1 U1.L25 | length 2604.9
  Top Layer w4.7: v2(1479.74,1573.97) 1479.74,1571.62 1479.35,1571.23 1479.35,1573.24 1478.07,1574.52 1478.07,1573.5 1477.47,1572.9 1492.44,1557.93 1734.76,1557.93 1811.12,1481.57 2226.59,1481.57 2248.67,1459.49 2248.88,1459.49 v2(2255.47,1452.9)
  Top Layer w6: U1.L25@1461.01,1626.5 v2@1476.26,1611.25
  L6_INT_2 w4.5: v2@1476.47,1573.9 1476.47,1610.9 1476.94,1611.37 1478,1611.37 1478.76,1610.61 1478.7,1610.66 1478.65,1610.66 1478.41,1610.42 v2(1478.41,1610.25)
  L6_INT_2 w4.7: v2(2255.47,1452.9) 2290.54,1417.83 2392.98,1417.83 2576.21,1601.06 2576.21,2716.64 v1@2583.5,2723.93
  Bottom Layer w10: R693.1@2432.06,2677.9 2534.02,2677.9 v1(2581.78,2725.66)
NetR694_1: R694.1 RX.9 U1.M3 U1_RX.1 U519.6 | length 3038.9
  Top Layer w5: U1.M3@1431.01,2320.91 1431.01,2321.2 v1@1446.56,2336.76
  Top Layer w10: U519.6@848.13,3758.71 894.2,3758.71 v1(907.34,3771.85) 910.83,3771.85 R694.1@936.47,3797.49 991.93,3852.96 U1_RX.1@991.93,3884.9 991.93,3915.44 RX.9@913.47,3993.9
  L6_INT_2 w5: v1@909.49,3767.56 909.49,3699.1 690.23,3479.84 690.23,2942.67 731.87,2901.03 1109.93,2901.03 1120.72,2911.82 1597.16,2911.82 1718.51,2790.47 1718.51,2471.83 1631.21,2384.53 1535.32,2384.53 1513.44,2362.65 1465.65,2362.65 v1@1446.11,2343.11
  other v1: 1446.11,2337.21
NetR695_1: R695.1 U1.N24 | length 2941
  Top Layer w4.7: U1.N24@1399.52,1659.49 1383.77,1643.74 1383.77,1609.06 1405.8,1587.03 1405.8,1571.08 1457.01,1519.87 1711.12,1519.87 1790.16,1440.83 2191.4,1440.83 2230.85,1401.38 2308.59,1401.38 2355.47,1448.26 v2(2355.47,1453.9) v2@2356.47,1453.9
  L6_INT_2 w4.7: v2(2355.47,1453.9) 2370.47,1453.9 2542.12,1625.55 2542.12,2732.37 2542.32,2732.57 2542.32,2777.95 2542.32,3000.68 2552.47,3010.83 2555.63,3013.99 2560.19,3018.55 2600.12,3018.55 v1@2640.47,3058.9
  Bottom Layer w4.7: v1(2640.92,3065.31) 2658.06,3082.45 R695.1@2658.06,3093.9
NetR696_1: R696.1 U1.M22 | length 2123
  Top Layer w6: v2(1416.47,1737.9) 1431.01,1723.36 U1.M22@1431.01,1722.48
  L3_INT_1 w4.7: v2(1416.47,1737.9) 1415.47,1737.9 1366.47,1786.9 1366.47,1809.9 1358.68,1817.69 1342.68,1817.69 1337.64,1822.73 1337.64,2177.14 1335.62,2179.16 1335.62,2190.64 1337.64,2192.66 1337.64,2205.14 1337.62,2402.05 1364.92,2429.35 1370.84,2429.35 1415.39,2473.9 1415.47,2473.9 2120.36,3178.79 2279.58,3178.79 v4(2304.47,3153.9)
  Bottom Layer w10: v4(2304.47,3153.9) 2331.69,3153.9 2362.69,3184.9 R696.1@2385.88,3184.9
NetR697_1: R697.1 U1.M21 | length 2459.3
  Top Layer w6: U1.M21@1431.01,1753.98 v2(1446.76,1738.23)
  L3_INT_1 w4.7: 1274.32,1909.46 1274.32,1896.16 1274.31,1790.06 1279.47,1784.9 1316.81,1784.9 1343.81,1757.9 1374.26,1757.9 1411.26,1720.9 1429.43,1720.9 v2(1446.76,1738.23) v2@1445.14,1738.23 ; 1274.3,1909.48 1274.3,2111.14 1274.32,2122.64 1273.47,2123.49 1273.47,2406.9 1304.47,2437.9 1304.47,2457.9 1317.44,2470.87 1378.8,2470.87 2108.95,3201.01 2274.58,3201.01 2297.47,3223.9 2346.47,3223.9 2355.47,3214.9 2355.47,3156.9 2322.46,3123.89 v4(2322.46,3125.6)
  Bottom Layer w10: v4(2322.46,3125.6) 2375.58,3125.6 R697.1@2385.88,3135.9
NetR698_1: R698.1 U1.L24 | length 2250.3
  Top Layer w6: U1.L24@1462.51,1659.49 1477.65,1644.35 v15(1477.65,1645.39)
  L3_INT_1 w4.7: v15(1477.65,1645.39) 1477.65,1644.35 1478.26,1643.74 1490.83,1643.74 1504.18,1630.39 1516.96,1630.39 1523.77,1637.2 1523.77,1705.96 ; 1505.97,1784.4 1493.47,1796.9 1493.47,1805.6 1483.99,1815.07 1481.26,1815.07 1462.47,1833.86 1462.47,2060.99 1462.02,2061.44 1462.02,2407.87 1461.9,2407.99 1461.9,2451.56 2144.45,3134.11 2231.94,3134.11 2254.55,3111.5 2254.55,3037.2 2263.29,3028.46 2284.58,3028.46 2297.88,3041.76 2297.88,3050.12 v1@2298.83,3051.07
  L3_INT_1 w5: 1505.97,1784.4 1516.45,1784.4 1523.77,1777.08 1523.77,1705.96
  Bottom Layer w4.7: v1(2299.21,3048.6) 2341.51,3090.9 R698.1@2384.88,3090.9
NetR699_1: R699.1 U1.K24 | length 2384.3
  Top Layer w6: U1.K24@1494.01,1659.49 1509.09,1644.41 v15(1509.09,1645.77)
  Top Layer w10: R699.1@2261.88,2876.9 2261.88,2955.31 v4(2304.47,2997.9)
  L3_INT_1 w4.5: 1399.47,2094.38 1382.16,2111.69 1382.16,2283.37 1399.47,2300.68
  L3_INT_1 w4.7: 1399.47,2094.38 1399.47,2072.9 1383.47,2056.9 1383.47,1853.9 1399.47,1837.9 1399.47,1795.9 1433.07,1762.3 1460.07,1762.3 1468.47,1753.9 1482.47,1753.9 1486.77,1749.6 1486.77,1746.77 1492.47,1741.07 1492.47,1661.03 1509.09,1644.41 v15(1509.09,1645.77) ; 1399.47,2300.68 1399.47,2382.05 ; 1439.47,2424.91 1439.47,2460.9 2133.29,3154.72 2250.9,3154.72 2307.47,3098.15 2307.74,3098.15 2320.82,3085.07 2320.82,3014.25 v4(2304.47,2997.9)
  L3_INT_1 w5: 1399.47,2382.05 1417.45,2400.03 1439.47,2422.03 1439.47,2424.91
NetR700_1: R700.1 U1.L21 | length 2253.6
  Top Layer w6: U1.L21@1462.51,1753.98 1478.26,1738.23 1476.93,1736.9 v2(1476.47,1736.9)
  L3_INT_1 w4.7: v2(1476.47,1736.9) 1476.93,1736.9 1478.26,1738.23 1476.59,1739.9 1467.47,1739.9 1454.27,1753.1 1417.27,1753.1 1378.47,1791.9 1378.47,1837.9 1369.47,1846.9 1369.47,2405.9 1383.32,2419.75 1383.32,2420.09 1426.47,2463.24 1426.47,2466.9 2124.47,3164.9 2256.94,3164.9 2333.59,3088.25 2333.59,2991.05 v4@2326.93,2984.39
  Bottom Layer w10: v4(2326.75,2985.12) 2356.97,2954.9 R700.1@2381.88,2954.9
NetR701_1: R701.1 U1.J25 | length 2345.8
  Top Layer w6: U1.J25@1525.5,1628 v2@1540.83,1643.32
  L3_INT_1 w4.7: 1495.06,2075.29 1495.06,2094.53 1485.69,2103.9 1485.69,2116.72 1494.07,2125.1 1494.07,2218.82 1474.8,2238.09 1474.8,2293.65 1524.15,2343 1524.15,2387.61 1538.04,2401.5 1538.04,2511.01 2149.52,3122.49 2224.62,3122.49 2241.67,3105.44 2241.67,3034.39 2360.94,2915.12 2360.94,2833.33 v1@2331.66,2804.05 ; 1495.12,1828.47 1495.12,2075.23 ; 1495.9,1826.98 1505.79,1817.1 1513.46,1817.1 1523.6,1806.96 ; 1523.6,1806.25 1542.47,1787.39 v2(1542.47,1771.9)
  L6_INT_2 w4.7: v2(1540.83,1643.52) 1540.83,1724.26 1540.93,1724.36 v2@1540.93,1771.44
  Bottom Layer w4.7: v1(2331.3,2802.12) 2335.1,2802.12 R701.1@2379.88,2846.9
NetR702_1: R702.1 U1.L20 | length 2298.8
  Top Layer w6: U1.L20@1462.51,1785.48 v2(1478.26,1769.73)
  L3_INT_1 w4.7: v2(1478.26,1769.73) 1477.16,1769.73 1450.47,1796.41 1450.47,1804.9 1398.47,1856.9 1398.47,2050.9 1430.47,2082.9 1430.47,2401.93 1452.6,2424.05 1452.6,2459.03 2137.64,3144.07 2244.62,3144.07 2273.47,3115.22 v4(2273.47,3045.9)
  Bottom Layer w4.7: v4(2273.47,3045.9) 2273.47,2920.63 2315.39,2878.71 2315.39,2789.03 2322.76,2781.66 2371.64,2781.66 R702.1@2379.88,2789.9
NetR711_1: R711.1 U22.18 | length 170.5
  Top Layer w5: v2(427.47,3952.9) 427.47,3948.9 449.88,3926.49 R711.1@449.88,3900.9
  Bottom Layer w5: U22.18@395.27,3857.6 395.27,3885.7 410.47,3900.9 410.47,3929.9 426.47,3945.9 v2@426.47,3953.9
NetR785_1: R785.1 SW3.2 U1.A17 | length 3621.5
  Top Layer w10: v1@632.84,1367.89 700.03,1300.7 1837.23,1300.7 1884.1,1347.57 v3(1883.19,1347.57) ; U1.A17@1777.47,1879.96 v3@1800.75,1879.96
  L3_INT_1 w10: SW3.2@158.47,2601.9 211.59,2548.78 211.59,2129.51 250.5,2090.6 250.5,2068.06 250.78,2067.78 250.78,2044.64 250.86,2044.56 226.22,2019.91 226.22,1590.95 340.67,1476.5 340.67,1399.06 399.77,1339.96 506.43,1339.96 535.16,1368.69 v1(631.64,1368.69)
  Bottom Layer w10: v3(1801.22,1880.13) 1811.05,1870.3 1811.05,1816.48 1831.63,1795.9 1831.95,1795.9 1881.93,1745.92 1881.93,1348.6 v3@1883.1,1347.43
  Bottom Layer w20: SW3.2@158.47,2601.9 209.93,2601.9 R785.1@248.47,2640.44
NetR786_1: R786.1 SW4.2 U1.T24 | length 1519.5
  Top Layer w10: v1(1290.9,1644.24) 1305.03,1658.37 U1.T24@1305.03,1659.49
  Bottom Layer w10: R786.1@257.47,1574.36 293.02,1538.81 293.02,1383.28 332.98,1343.32 1066.75,1343.32 1291.57,1568.14 v1@1291.57,1641.44
  Bottom Layer w20: SW4.2@154.47,1593.9 237.93,1593.9 R786.1@257.47,1574.36
NetR850_1: R850.1 SW5.2 U1.H25 | length 2419.6
  Top Layer w10: U1.H25@1557,1631.44 U1.H25@1557,1628 1577.66,1607.33 v1@1600.83,1607.33
  L3_INT_1 w10: SW5.2@156.47,2107.9 151.66,2103.09 151.66,2012.17 203.59,1960.24 203.59,1550.32 287.74,1466.17 287.74,1387.35 357.55,1317.54 999.1,1317.54 1307.97,1626.41 1485.73,1626.41 1504.82,1607.32 v1(1602.85,1607.32)
  Bottom Layer w20: R850.1@89.01,2030.9 89.01,2040.44 SW5.2@156.47,2107.9
NetR901_2: R901.2 R902.2 | length 99.5
  Top Layer w10: R902.2@2015.93,592.9 2045.93,562.9 R901.2@2103.01,562.9
NetR902_1: R902.1 U901.10 | length 226
  Top Layer w10: U901.10@1810.47,726.77 1859.87,726.77 1894.66,691.98 1894.66,637.39 1939.15,592.9 R902.1@1949.01,592.9
NetR903_1: R903.1 U901.11 | length 184.7
  Top Layer w10: U901.11@1810.47,762.2 1855.62,762.2 1948.01,669.81 R903.1@1948.01,660.9
NetR910_1: R910.1 U901.17 | length 140.4
  Top Layer w4.7: R910.1@1538.47,929.44 1538.47,909.18 1586.57,861.08 U901.17@1586.57,808.95
NetSH100_1: SH100.1 U501.5 | length 1200.4
  Top Layer w10: v3@2056.05,3683.3 2076.93,3662.42 SH100.1@2076.93,3656.9 ; v3(2923.43,3880.11) 2923.43,3899.89 2999.97,3976.43 U501.5@3051.59,3976.43
  L6_INT_2 w10: v3(2055.57,3681.24) 2055.57,3736.38 2201.48,3882.29 2924.4,3882.29 v3@2925.35,3881.34
NetSH101_1: SH101.1 U521.5 | length 1151.6
  Top Layer w10: v3@2078.67,3512.14 2078.93,3512.4 SH101.1@2078.93,3549.9 ; v3(3028.93,3805.24) 3031.78,3805.24 U521.5@3050.59,3786.43
  L6_INT_2 w10: v3(2079.72,3512.57) 2079.72,3535.65 2336.1,3792.03 3015.72,3792.03 v3(3028.93,3805.24) ; v3@3030.96,3803.78 v3@3030.96,3804.12
NetTX_9: TX.9 U1-TX.1 U1.M1 U519.5 | length 2859.6
  Top Layer w5: U519.5@857.2,3733.12 v5@889.25,3733.12
  Top Layer w6: U1.M1@1431.01,2383.9 v2(1446.76,2399.65)
  Top Layer w10: U1-TX.1@764.93,3661.9 764.93,3692.6 805.45,3733.12 U519.5@848.13,3733.12 U519.5@857.2,3733.12 ; TX.9@869.47,3691.9 893.47,3715.9 v5(893.47,3733.9)
  L6_INT_2 w4.7: 678.47,2937.72 678.47,3483.9 893.47,3698.9 v5(893.47,3733.9)
  L6_INT_2 w5: 678.47,2937.72 725.29,2890.9 1117.47,2890.9 1127.02,2900.45 1592.92,2900.45 1707.47,2785.9 1707.47,2476.9 1625.47,2394.9 1530.88,2394.9 1508.88,2372.9 1465.47,2372.9 1446.76,2391.61 v2(1446.76,2399.65)
NetU1_F11: U1.F11 U8.4 | length 3333.8
  Top Layer w5: U8.4@1078.47,3057.96 1080.47,3055.95 1152.42,3055.95 1152.53,3055.84 1165.6,3055.84 1179.92,3041.52 v5(1183.1,3041.52)
  Top Layer w6: U1.F11@1619.99,2068.94 v2(1635.74,2084.69)
  L3_INT_1 w5: v5(1777.47,3017.9) 1938.47,3178.9 v5@1953.47,3178.9
  L6_INT_2 w4.7: v5@1181.79,3040.21 v5(1183.1,3041.52)
  L6_INT_2 w5: v5@1181.79,3040.21 1181.79,3002.58 1249.47,2934.9 1531.47,2934.9 1616.47,3019.9 v5@1776.47,3019.9 ; v5(1811.35,2001.68) 1811.35,2080.63 1846.28,2115.56 2057.48,2115.56 2098.64,2074.4 2213.99,2074.4 2331.04,2191.45 2376.02,2191.45 2390.47,2205.9 2390.47,2247.9 2332.47,2305.9 2100.28,2305.9 2039.41,2366.77 2039.41,3093.96 v5@1955.47,3177.9
  Bottom Layer w6: v2(1635.74,2084.69) 1651,2069.43 1773.93,2069.43 1811.35,2032.01 v5(1811.35,2001.68)
  other v5: 1954.47,3178.9
NetU1_T5: U1.T5 U15.2 | length 2214
  Top Layer w4.5: U1.T5@1305.03,2257.92 1305.49,2257.92 1320.62,2273.05 1320.62,2268.06 1320.97,2268.41 v2@1320.97,2269.23
  Top Layer w5: U15.2@1872.47,3666.58 1888.13,3666.58 v3(1905.78,3684.23)
  L3_INT_1 w5: v2(1622.8,3241.08) 1622.8,3343.39 1839.3,3559.89 1839.3,3657.5 1867.1,3685.3 v3@1906.27,3685.3
  L6_INT_2 w4.7: 1790.97,2420.4 1798.47,2427.9 1798.47,2466.9
  L6_INT_2 w5: v6(1355.47,2369.9) 1355.47,2371.9 1354.47,2372.9 1365.47,2383.9 1393.47,2383.9 1401.47,2375.9 1401.47,2357.9 1434.66,2324.71 1452.69,2324.71 1463.47,2335.49 1463.47,2343.9 1471.47,2351.9 1658.47,2351.9 1688.07,2381.5 1752.07,2381.5 1790.97,2420.4 ; v2@1624.06,3241.22 1654.24,3241.22 1798.47,3096.99 1798.47,2466.9
  Bottom Layer w4.7: v2@1320.97,2269.23 1320.97,2268.41 1320.62,2268.06 1320.62,2273.05 v2@1321.25,2273.68 ; v2(1321.25,2270.77) v2@1321.25,2273.68 ; v6@1353.47,2372.9 1334.19,2353.62 1334.19,2333.15 1321.25,2320.21 v2@1321.25,2273.68
NetU22_2: U22.2 U519.3 | length 316.5
  Top Layer w10: v5@493.47,3643.9 493.47,3662.9 504.47,3673.9 603.47,3673.9 645.47,3715.9 645.47,3740.9 663.28,3758.71 U519.3@702.47,3758.71
  Bottom Layer w10: v5(493.47,3640.9) 493.77,3641.2 U22.2@493.77,3674.9
NetU22_9: U22.9 U519.1 U519.7 | length 660.6
  Top Layer w10: v5@317.47,3693.9 v5(318.47,3693.9) 589.47,3693.9 623.47,3727.9 623.47,3787.9 645.47,3809.9 U519.1@702.47,3809.9 782.47,3809.9 808.06,3784.31 U519.7@848.13,3784.31
  Bottom Layer w10: v5(318.47,3693.9) 321.87,3697.3 U22.9@353.17,3697.3
NetU22_30: U22.30 U519.2 | length 188.3
  Top Layer w10: v5(656.47,3782.9) 657.88,3784.31 U519.2@702.47,3784.31
  Bottom Layer w10: U22.30@535.87,3736.7 612.27,3736.7 v5@658.47,3782.9
NetU51_2: U51.2 Y51.2 | length 175.8
  Bottom Layer w30: U51.2@2271.47,964.9 2343.45,1036.88 Y51.2@2417.47,1036.88
NetU51_3: U51.3 Y51.1 | length 184.9
  Bottom Layer w30: U51.3@2271.47,1064.9 2365.49,1158.92 Y51.1@2417.47,1158.92
NVCC_3V3: C630.1 C636.2 C684.2 C693.2 C709.2 C725.1 R727.1 U1.G14 U1.G15 U1.G17 U1.J7 U1.P7 U1.P19 | length 625.4
  Top Layer w5: v2(1509.47,2210.9) U1.J7@1525.5,2194.92 U1.J7@1525.5,2194.92
  Top Layer w6: v2(1352.27,1801.22) U1.P19@1368.02,1816.97 ; v2@1352.27,2210.67 U1.P7@1368.02,2194.92 ; U1.G17@1588.49,1879.96 1605.43,1863.03 1606.66,1863.03 1606.86,1863.23 v2(1606.86,1863.52) ; U1.G14@1588.49,1974.45 v2(1604.24,1958.7)
  Top Layer w10: U1.G15@1588.49,1942.96 v2(1604.24,1958.7)
  Top Layer w20: v10@1834.47,1827.9 1847.88,1841.31 R727.1@1884.47,1841.31
  L3_INT_1 w10: v2(1604.24,1958.7) 1606.89,1958.7 1624.17,1975.98 1628.18,1975.98 1628.26,1975.9 1650.49,1975.9 1680.69,2006.1 1705.68,2006.1 1716.04,2006.09 1750.74,2040.79 1750.74,2059.05 1742.58,2067.21 1723.49,2067.21 1723.05,2066.77 1717.82,2066.77 v17(1699.72,2084.87)
  Bottom Layer w5: v2(1509.47,2210.9) 1521.47,2198.9 C636.2@1525.47,2198.9
  Bottom Layer w8: C693.2@1618.47,1947.9 1623.15,1943.22 1649.73,1943.22 v1@1666.77,1926.18
  Bottom Layer w10: C630.1@1331.86,2202.51 1341.08,2202.51 1350.47,2211.9 1350.47,2210.9 v2(1351.47,2210.9) ; C725.1@1335.47,1800.9 v2@1351.95,1800.9 ; C684.2@1593.44,1947.9 v2(1604.24,1958.7) ; v2@1607.15,1862.22 C709.2@1622.47,1846.9 ; v2@1607.67,1958.7 C693.2@1618.47,1947.9
  other v1: 1668.07,1926.41
  other v10: 1835.47,1827.9
NVCC_CSI: C629.2 R45.1 U1.N7 | length 417.5
  Top Layer w6: U1.N7@1399.52,2194.92 v2(1415.27,2210.67)
  Top Layer w20: 1339.47,2462.9 1339.47,2501.31 R45.1@1341.47,2503.31
  L6_INT_2 w8: v2(1339.47,2455.9) 1339.47,2440.19 1305.77,2406.49 1305.77,2394.06 1292.5,2380.79 1292.5,2342.98 1347.5,2287.98 1360.66,2287.98 1388.34,2260.3 1388.34,2222.78 1400.45,2210.67 v2(1415.27,2210.67)
  Bottom Layer w10: v2(1415.27,2210.67) 1421.04,2204.9 1426.47,2204.9 C629.2@1432.47,2198.9
NVCC_EIM: C69.1 C724.2 C730.1 R625.1 U1.K19 U1.L19 U1.M19 | length 646.8
  Top Layer w6: U1.L19@1462.51,1816.97 v2(1478.26,1801.22) ; U1.K19@1494.01,1816.97 v2(1509.75,1801.22)
  Top Layer w10: U1.M19@1431.01,1816.97 U1.L19@1462.51,1816.97 U1.K19@1494.01,1816.97
  Top Layer w20: v4@1569.16,1471.67 C69.1@1596.47,1444.36
  Bottom Layer w10: C724.2@1454.47,1788.9 1462.47,1788.9 v2@1474.79,1801.22 ; v2(1478.26,1801.22) v2(1509.75,1801.22) C730.1@1590.61,1801.22
  Bottom Layer w20: v4(1563.27,1471.67) 1569.65,1471.67 1587.98,1490 R625.1@1588.47,1490.49 ; R625.1@1584.57,1497.43 1570.01,1511.99 1570.01,1669.25 1550.1,1689.16 1550.1,1742.43 1594.03,1786.36 C730.1@1602.47,1786.36
NVCC_MIPI: U1.K7 | length 18.2
  Top Layer w5: v6@1481.47,2207.9 1494.01,2195.36 U1.K7@1494.01,2194.92
  other v6: 1480.61,2208.15
NVCC_PLL_OUT: C605.1 C628.2 U1.E8 | length 97.8
  Top Layer w6: U1.E8@1651.49,2163.43 v2(1667.23,2179.18)
  Top Layer w10: U1.E8@1651.49,2163.43 v2(1667.23,2179.18)
  Bottom Layer w10: C628.2@1655.47,2159.9 1655.47,2166.9 v2@1666.23,2177.66 ; v2(1667.23,2179.18) C605.1@1667.23,2210.2
NVCC_RGMII: C723.1 U1.G18 | length 47.3
  Top Layer w8: U1.G18@1588.49,1848.47 1588.49,1844.88 v25@1600.47,1832.9
  Bottom Layer w8: C723.1@1587.47,1849.9 1592.2,1849.9 1604.47,1837.63 v25(1604.47,1832.9)
NVCC_SD1: C695.2 R104.1 U1.G16 | length 353.8
  Top Layer w6: U1.G16@1588.49,1911.46 v2(1604.24,1895.71)
  Bottom Layer w10: C695.2@1591.39,1899.9 1599.18,1899.9 1602.67,1896.41 1603.54,1896.41 v2(1604.24,1895.71) 1609.28,1895.71 1623.55,1909.98 1812.39,1909.98 R104.1@1883.47,1838.9
  Bottom Layer w20: R104.1@1882.06,1840.31 R104.1@1884.47,1840.31
P3V3_LICELL: C590.2 U8.42 | length 94.4
  Top Layer w10: U8.42@775.19,2998.9 776.69,3000.4 810.6,3000.4 822.1,3011.9 v4@834.47,3011.9
  Bottom Layer w10: v4(837.47,3009.9) 845.47,3001.9 C590.2@845.47,2983.49
PMIC_5V: SH15.2
PMIC_INT_B: R28.1 U1.P6 U8.1 | length 973.5
  Top Layer w6: R28.1@1115.47,2904.49 1116.47,2903.49 1138.47,2881.49 1138.47,2758.93 1157.47,2739.93 1157.47,2454.9 1185.97,2426.4 1263.48,2426.4 v6@1289.47,2400.41 ; v2(1352.27,2242.17) U1.P6@1368.02,2226.42
  Top Layer w10: U8.1@1078.47,2998.9 1085.47,2998.9 1116.47,2967.9 1116.47,2903.49 R28.1@1116.47,2898.9
  L6_INT_2 w5: v6(1289.47,2399.9) 1285.92,2396.35 1274.79,2396.35 1265.89,2387.45 1265.89,2351.72 1335.3,2282.31 1335.3,2259.14 v2(1352.27,2242.17)
PMIC_VSNVS: C130.2 C596.2 C657.2 D10.2 R29.2 R31.1 R94.2 R97.2 R106.2 R109.2 R304.2 R447.2 R448.2 SH3V0.1 SH3V00.1 SH3V00.2 U1.G11 U8.43 U13.5 | length 5713.9
  Top Layer w6: U1.G11@1588.49,2068.94 v2(1604.24,2084.69)
  Top Layer w10: v4(153.47,3122.9) R304.2@153.47,3161.31 ; v4(753.47,2964.9) 763.47,2974.9 U8.43@798.71,2974.9 ; v4@1028.47,2824.9 1028.47,2828.31 R31.1@1051.47,2851.31 ; R29.2@1175.47,2854.31 1175.47,2849.9 v4@1202.47,2822.9 ; U13.5@1644.87,3127.5 U13.5@1656.21,3127.5 ; v17@1647.53,2552.05 1654.47,2558.99 D10.2@1654.47,2588.9 D10.2@1654.47,2572.9
  Top Layer w20: v4@1315.93,2824.9 SH3V0.1@1349.47,2858.44 ; v3@1525.72,3246.39 1499.93,3272.18 R448.2@1499.93,3284.9 1506.47,3284.9 1557.01,3335.44 1638.93,3335.44 ; U13.5@1644.87,3127.5 1635.17,3127.5 1618.15,3144.52 1618.15,3201.58 1648.93,3232.36 R447.2@1648.93,3281.9 1648.93,3325.44 1638.93,3335.44 ; D10.2@1654.47,2588.9 1664.79,2578.58 1952.33,2578.58 ; U13.5@1661.86,3133.15 1689.71,3133.15 1726.46,3169.9 C130.2@1741.01,3169.9 ; v4@1701.01,3335.44 1638.93,3335.44 ; v3(1950.26,2552.65) 1950.26,2576.51 1952.33,2578.58 ; R109.2@2692.47,2640.49 2689.47,2637.49 R94.2@2392.47,2637.49 2269.41,2637.49 2210.5,2578.58 1952.33,2578.58
  L3_INT_1 w8: 1584.25,2132.47 1588.9,2127.82 1588.9,2100.03 v2(1604.24,2084.69)
  L3_INT_1 w12: 1584.25,2132.47 1566.64,2150.08 1566.64,2154.7 1566.54,2154.8 1566.54,2212.95 1524.66,2254.83 1524.66,2283.01 1591.05,2349.4 1591.05,2485.58 1646.49,2541.02 v17(1646.49,2549.77)
  L3_INT_1 w20: v4(153.47,3122.9) 189.4,3086.97 738.53,3086.97 777.44,3048.06 777.44,2988.87 v4(753.47,2964.9) ; v4(1314.47,2824.9) 1314.47,2853.75 1515.77,3055.05 1515.77,3231.78 v3(1527.08,3243.09)
  L6_INT_2 w20: v4(753.47,2964.9) 763.47,2974.9 1106.47,2974.9 v4(1141.47,2939.9) ; v4(1702.47,3334.9) 1824.62,3334.9 1903.6,3255.92 1903.6,3137.53 1950.59,3090.54 1950.59,2556.53 v3@1950.26,2556.2
  Bottom Layer w10: v4@755.47,2965.9 774.06,2984.49 C596.2@783.47,2984.49 ; SH3V00.2@1193.47,2867.44 1200.47,2860.44 v4(1200.47,2825.9) ; C657.2@1588.47,2068.92 v2(1604.24,2084.69)
  Bottom Layer w20: v4(1026.47,2822.9) 1071.01,2867.44 SH3V00.2@1193.47,2867.44 1271.93,2867.44 v4@1313.47,2825.9 ; v4(1141.47,2939.9) 1147.01,2934.36 SH3V00.1@1193.47,2934.36
  Bottom Layer w40: SH3V00.2@1193.47,2867.44 SH3V00.1@1193.47,2934.36
POR_B: R125.1 R448.1 SHB2.1 SHB2.2 U1.C11 U8.3 U13.3 U13.4 | length 3070.4
  Top Layer w6: U1.C11@1714.48,2068.94 v2(1730.23,2084.69)
  Top Layer w10: U8.3@1078.47,3038.27 1098.35,3038.27 1213.13,2923.49 R125.1@1237.47,2923.49
  Top Layer w20: R125.1@1237.47,2923.49 1311.57,2997.59 1401.21,2997.59 1432.01,3028.39 SHB2.1@1432.01,3168.9 SHB2.2@1498.93,3168.9 1498.93,3218.97 R448.1@1433.01,3284.9 ; SHB2.2@1503.93,3163.9 1503.93,3110.71 1524.54,3090.1 U13.3@1577.47,3090.1 U13.4@1656.21,3090.1 1734.67,3090.1 1761.47,3116.9 1966.98,3116.9 v18(1970.76,3113.12)
  L3_INT_1 w20: v4@1847.76,2031.19 v4(1847.76,2032.37) 1854.23,2025.9 2113.47,2025.9 2227.02,2139.45 2227.02,2256.35 v4(2198.47,2284.9)
  L6_INT_2 w20: v18(1970.76,3113.12) 2017.68,3066.2 2017.68,2357.69 2090.47,2284.9 v4(2198.47,2284.9)
  Bottom Layer w10: v2(1730.23,2084.69) 1794.02,2084.69 v4@1845.93,2032.78 ; v4@1847.76,2031.19 v4(1847.76,2032.37)
PWRON: C597.2 R30.1 R31.2 R304.1 SW2.2 U8.56 U507.4 | length 2102.4
  Top Layer w10: R304.1@153.47,3212.49 SW2.2@153.47,3369.61 ; SW2.2@157.47,3371.9 202.47,3371.9 224.47,3349.9 ; C597.2@231.47,3215.49 224.47,3222.49 224.47,3349.9 ; v5(296.47,3349.9) 224.47,3349.9 ; U507.4@997.65,2743.7 1004.65,2743.7 1084.47,2823.52 1084.47,2909.9 v4(1075.47,2918.9) ; R31.2@1052.47,2903.49 1059.69,2903.49 1097.47,2941.27 1097.47,2959.9 1082.47,2974.9 U8.56@1054.55,2974.9
  L3_INT_1 w10: v5(296.47,3349.9) 334.47,3387.9 1078.47,3387.9 1100.47,3365.9 1100.47,2943.9 v4(1075.47,2918.9)
  Bottom Layer w10: R30.1@1050.47,2915.9 1072.47,2915.9 v4(1075.47,2918.9)
RED: R306.2 U1.P25 | length 1585
  Top Layer w5: v1(1356.14,1595.08) 1368.02,1606.96 U1.P25@1368.02,1628
  Bottom Layer w5: R306.2@113.01,1494.9 160.38,1542.27 208.11,1542.27 220.78,1529.6 220.78,1388.3 282.95,1326.13 1088.04,1326.13 v1@1356.91,1595
RXLED: D12.2 U22.21 | length 104.8
  Top Layer w10: D12.2@392.17,3800.9 426.47,3800.9 v5(442.54,3816.97)
  Bottom Layer w5: v5@440.97,3815.4 v5(442.54,3816.97)
  Bottom Layer w10: v5(442.54,3816.97) 454.37,3828.8 U22.21@454.37,3857.6